# EAGLE board ControlParqueadero (EAGLE 5.07)
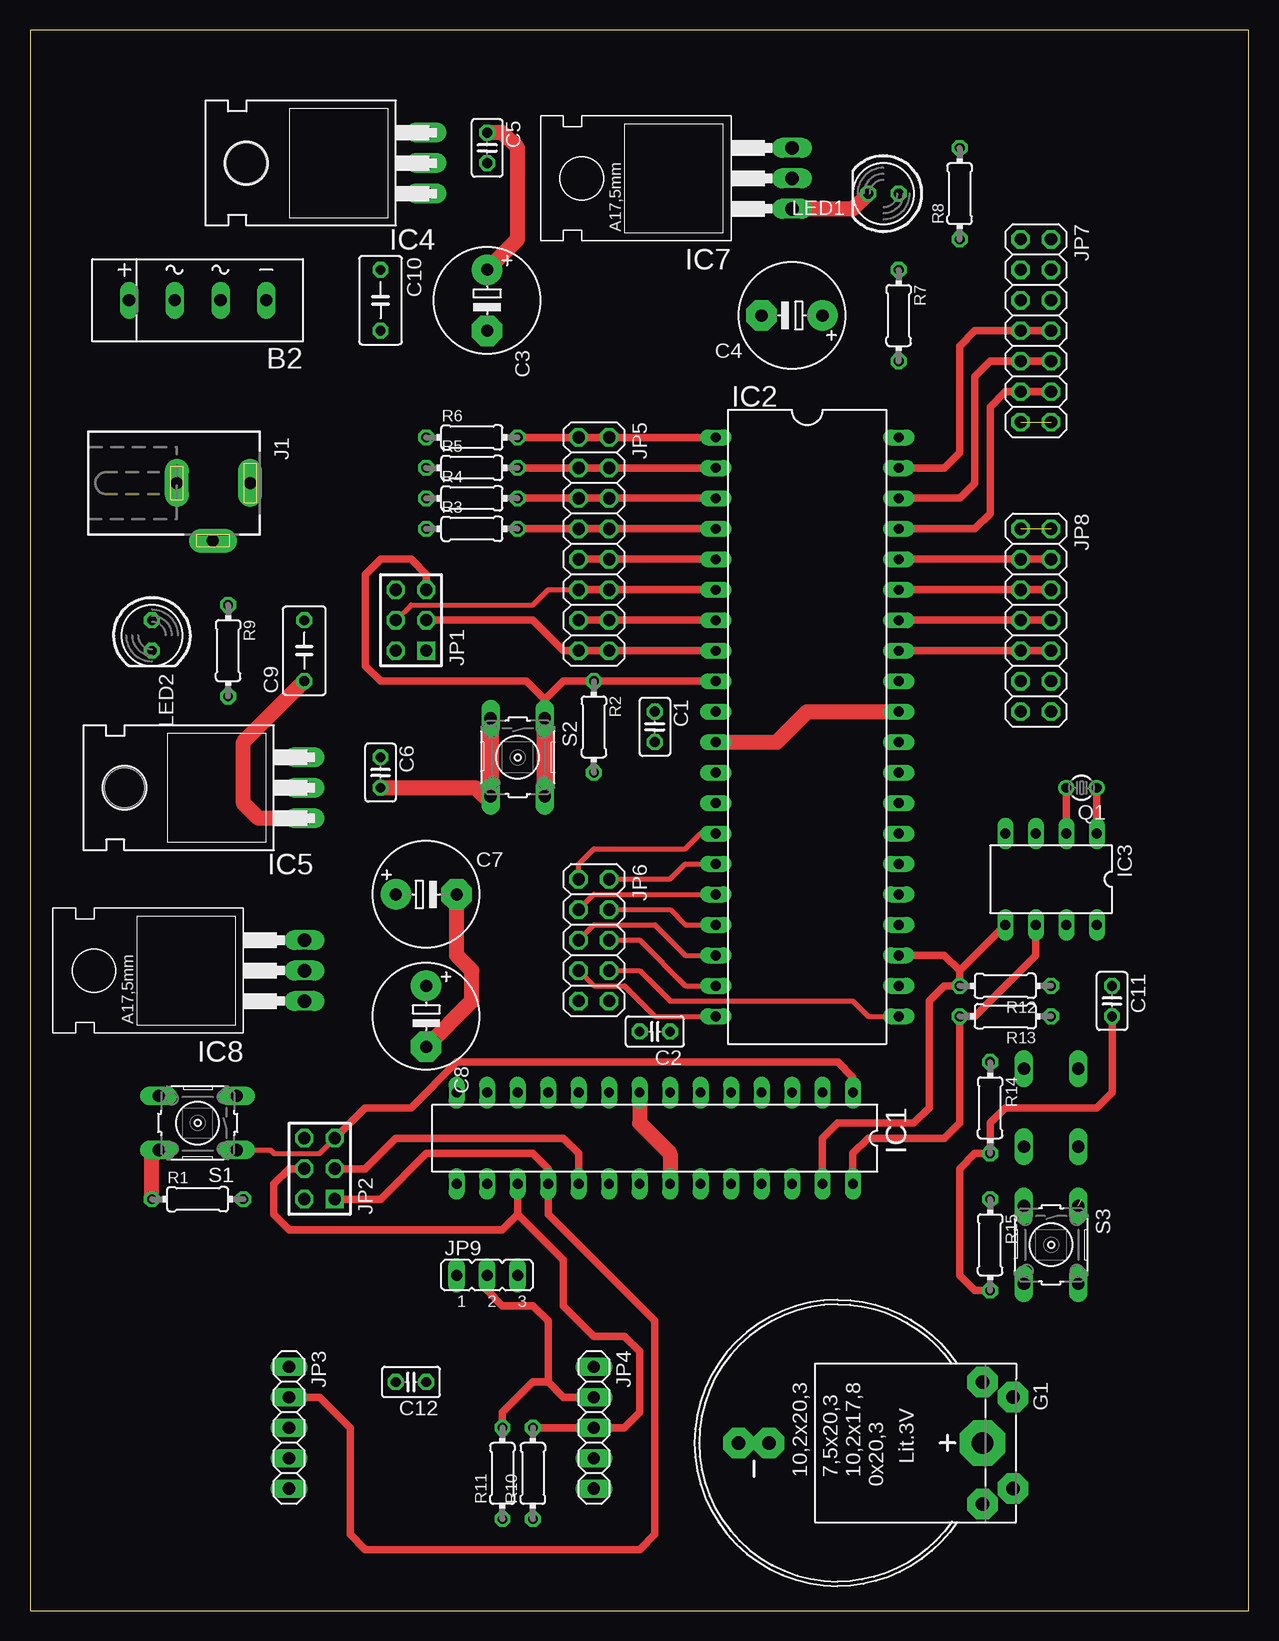
[diagram p0: board, top side]
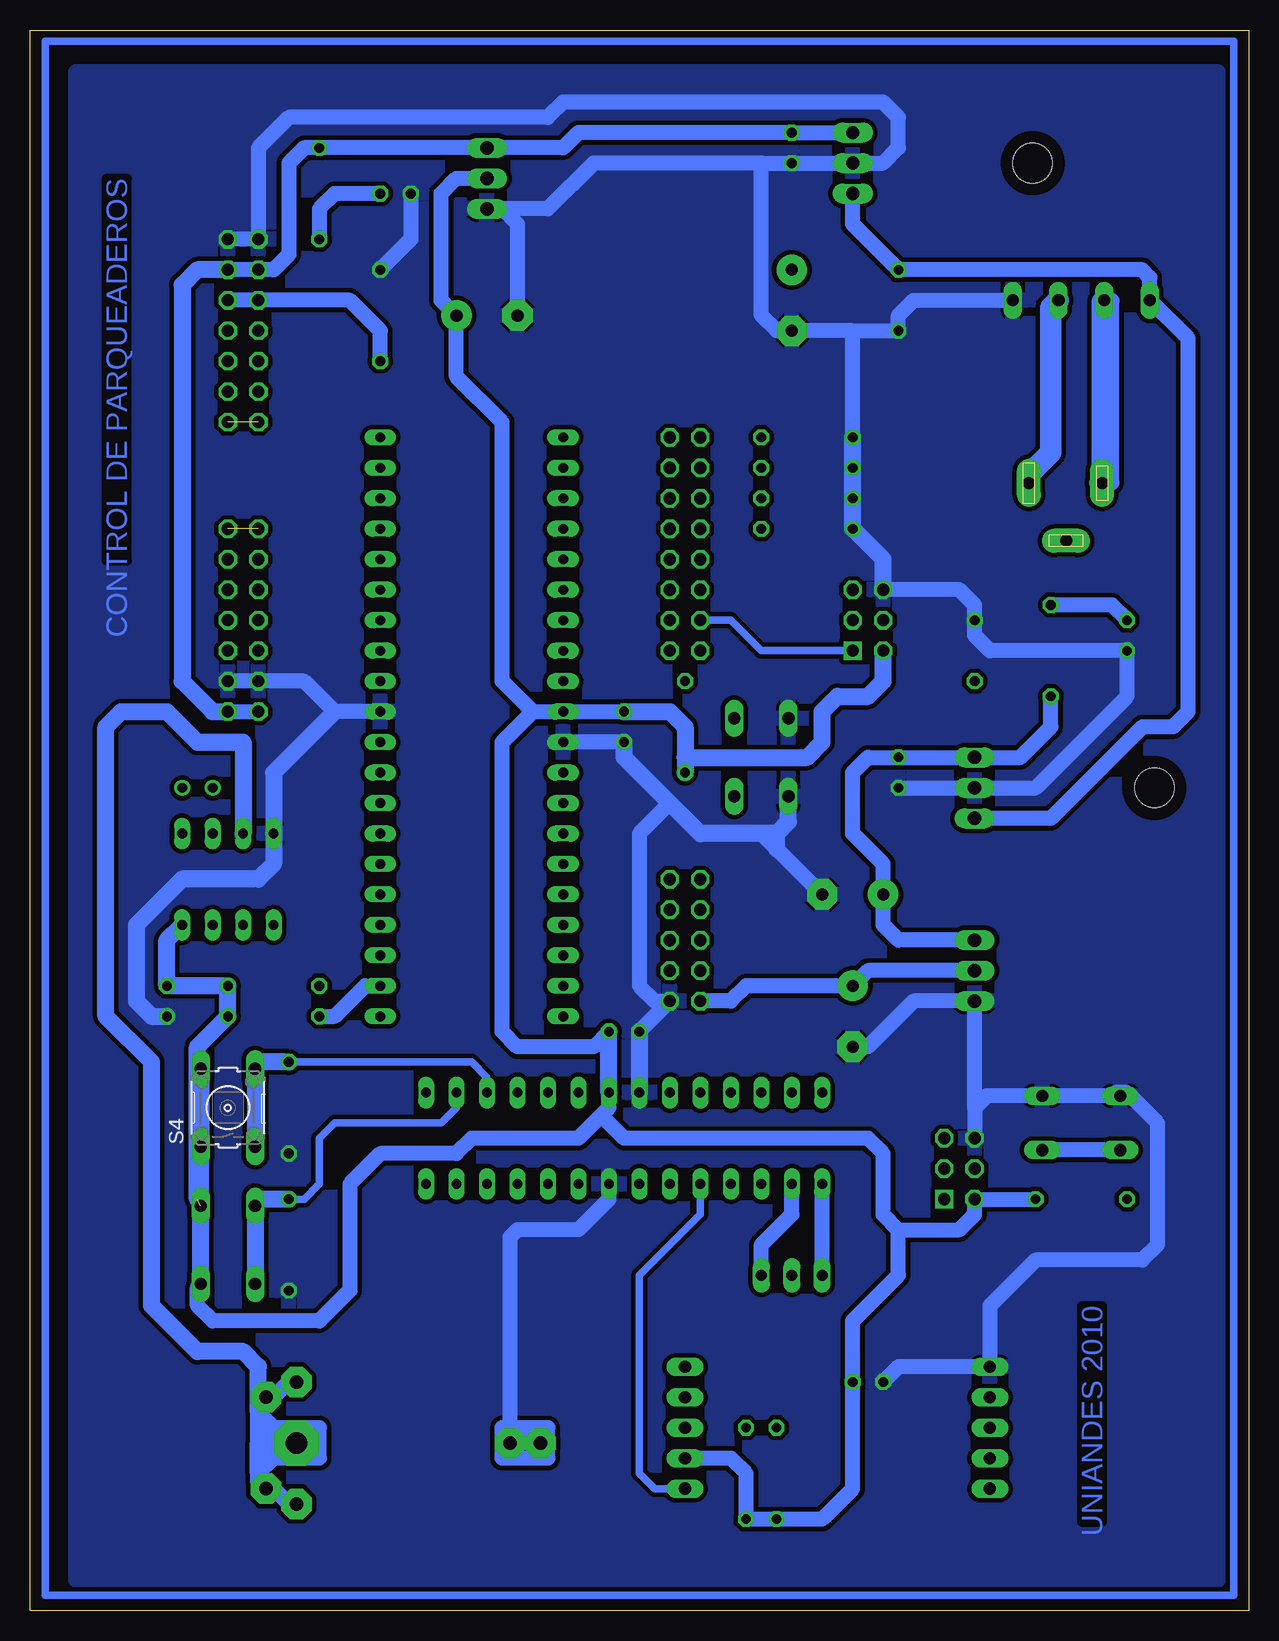
[diagram p1: board, bottom side, seen from below]

Size 101.58 x 131.75 mm. Coordinates in mm from the lower left corner, seen from the top.
Outline: 0,0 101.58,0 101.58,131.75 0,131.75 0,0
Copper layers (1*16): Top 0.035mm / dielectric 1.5mm / Bottom 0.035mm
Design rules "default *": minimum track width 10mil, minimum drill 24mil, track to track 15mil, track to pad 15mil, pad to pad 15mil, via to via 15mil, smd to smd 8mil, copper to edge 40mil, drill to drill 8mil, minimum pad ring 10mil, minimum via ring 8mil, stop-mask expansion 4mil, vias tented up to drill 0mil, thermal gap 10mil

## Footprints (pad centres in the part's own frame; a part is rotated, then mirrored left to right if it is on the bottom)
2KBP = drill 1.016 long: + 5.715,0; - -5.715,0; AC1 -1.905,0; AC2 1.905,0
C025-025X050 = drill 0.813 octagon: 1 -1.27,0; 2 1.27,0
E5-8,5 = drill 1.016 pad 2.54 round: + -2.54,0 | drill 1.016 pad 2.54 octagon: - 2.54,0
C050-035X075 = drill 0.813 octagon: 1 -2.54,0; 2 2.54,0
B2430UNI = drill 1.118 pad 2.54 octagon: + 3.81,14.605; +@1 -3.81,14.605; +@2 -5.08,12.065; +@3 5.08,12.065; - 0,-5.715; -@1 0,-8.255 | drill 1.803 pad 3.81 octagon: +@4 0,12.065
DIL28-3 = drill 0.813 long: 1 -16.51,-3.81; 2 -13.97,-3.81; 3 -11.43,-3.81; 4 -8.89,-3.81; 5 -6.35,-3.81; 6 -3.81,-3.81; 7 -1.27,-3.81; 8 1.27,-3.81; 9 3.81,-3.81; 10 6.35,-3.81; 11 8.89,-3.81; 12 11.43,-3.81; 13 13.97,-3.81; 14 16.51,-3.81; 15 16.51,3.81; 16 13.97,3.81; 17 11.43,3.81; 18 8.89,3.81; 19 6.35,3.81; 20 3.81,3.81; 21 1.27,3.81; 22 -1.27,3.81; 23 -3.81,3.81; 24 -6.35,3.81; 25 -8.89,3.81; 26 -11.43,3.81; 27 -13.97,3.81; 28 -16.51,3.81
DIL40 = drill 0.813 long: 1 -24.13,-7.62; 2 -21.59,-7.62; 3 -19.05,-7.62; 4 -16.51,-7.62; 5 -13.97,-7.62; 6 -11.43,-7.62; 7 -8.89,-7.62; 8 -6.35,-7.62; 9 -3.81,-7.62; 10 -1.27,-7.62; 11 1.27,-7.62; 12 3.81,-7.62; 13 6.35,-7.62; 14 8.89,-7.62; 15 11.43,-7.62; 16 13.97,-7.62; 17 16.51,-7.62; 18 19.05,-7.62; 19 21.59,-7.62; 20 24.13,-7.62; 21 24.13,7.62; 22 21.59,7.62; 23 19.05,7.62; 24 16.51,7.62; 25 13.97,7.62; 26 11.43,7.62; 27 8.89,7.62; 28 6.35,7.62; 29 3.81,7.62; 30 1.27,7.62; 31 -1.27,7.62; 32 -3.81,7.62; 33 -6.35,7.62; 34 -8.89,7.62; 35 -11.43,7.62; 36 -13.97,7.62; 37 -16.51,7.62; 38 -19.05,7.62; 39 -21.59,7.62; 40 -24.13,7.62
DIL08 = drill 0.813 long: 1 -3.81,-3.81; 2 -1.27,-3.81; 3 1.27,-3.81; 4 3.81,-3.81; 5 3.81,3.81; 6 1.27,3.81; 7 -1.27,3.81; 8 -3.81,3.81
TO220H = drill 1.118 long: 1 -2.54,-10.16; 2 0,-10.16; 3 2.54,-10.16 | hole 3.302: 0,4.826
TO220 = drill 1.118 long: 1 -2.54,-6.35; 2 0,-6.35; 3 2.54,-6.35
DCJ0202 = drill 1 pad 2 long: 1 0,3.1; 2 4.8,0; 3 0,-3
AVR-ISP-6 = drill 1.016 square: 1 -2.54,-1.27 | drill 1.016 octagon: 2 -2.54,1.27; 3 0,-1.27; 4 0,1.27; 5 2.54,-1.27; 6 2.54,1.27
1X05 = drill 1.016 long: 1 -5.08,0; 2 -2.54,0; 3 0,0; 4 2.54,0; 5 5.08,0
2X08 = drill 1.016 octagon: 1 -8.89,-1.27; 2 -8.89,1.27; 3 -6.35,-1.27; 4 -6.35,1.27; 5 -3.81,-1.27; 6 -3.81,1.27; 7 -1.27,-1.27; 8 -1.27,1.27; 9 1.27,-1.27; 10 1.27,1.27; 11 3.81,-1.27; 12 3.81,1.27; 13 6.35,-1.27; 14 6.35,1.27; 15 8.89,-1.27; 16 8.89,1.27
2X05 = drill 1.016 octagon: 1 -5.08,-1.27; 2 -5.08,1.27; 3 -2.54,-1.27; 4 -2.54,1.27; 5 0,-1.27; 6 0,1.27; 7 2.54,-1.27; 8 2.54,1.27; 9 5.08,-1.27; 10 5.08,1.27
2X07 = drill 1.016 octagon: 1 -7.62,-1.27; 2 -7.62,1.27; 3 -5.08,-1.27; 4 -5.08,1.27; 5 -2.54,-1.27; 6 -2.54,1.27; 7 0,-1.27; 8 0,1.27; 9 2.54,-1.27; 10 2.54,1.27; 11 5.08,-1.27; 12 5.08,1.27; 13 7.62,-1.27; 14 7.62,1.27
JP2 = drill 0.914 long: 1 -2.54,0; 2 0,0; 3 2.54,0
LED5MM = drill 0.813 octagon: A -1.27,0; K 1.27,0
TC26V = drill 0.813 round: 1 -1.27,0; 2 1.27,0
0204/7 = drill 0.813 octagon: 1 -3.81,0; 2 3.81,0
B3F-10XX = drill 1.016 long: 1 -3.251,2.261; 2 3.251,2.261; 3 -3.251,-2.261; 4 3.251,-2.261

## Placement (x,y rotation side)
B2  RECTIFIER-2KBP  [2KBP]  13.97,109.22 180 top
C1  [C025-025X050]  52.07,73.66 270 top
C2  [C025-025X050]  52.07,48.26 180 top
C3  [E5-8,5]  38.1,109.22 270 top
C4  [E5-8,5]  63.5,107.95 180 top
C5  0.1u  [C025-025X050]  38.1,121.92 270 top
C6  0.1u  [C025-025X050]  29.21,69.85 270 top
C7  [E5-8,5]  33.02,59.69 0 top
C8  [E5-8,5]  33.02,49.53 270 top
C9  0.33u  [C050-035X075]  22.86,80.01 90 top
C10  0.33u  [C050-035X075]  29.21,109.22 270 top
C11  [C025-025X050]  90.17,50.8 270 top
C12  [C025-025X050]  31.75,19.05 180 top
G1  B2430UNI  [B2430UNI]  67.31,13.97 270 top
IC1  ATMEGA48/88/168-PU  [DIL28-3]  52.07,39.37 180 top
IC2  MEGA164P/324P/644P-PU  [DIL40]  64.77,73.66 270 top
IC3  DS1307  [DIL08]  85.09,60.96 180 top
IC4  7805T  [TO220H]  22.86,120.65 90 top
IC5  7805T  [TO220H]  12.7,68.58 90 top
IC7  LM1117T-ADJ  [TO220]  57.15,119.38 90 top
IC8  LM1117T-ADJ  [TO220]  16.51,53.34 90 top
J1  DCJ0202  [DCJ0202]  15.24,93.98 270 top
JP1  AVR-ISP-6  [AVR-ISP-6]  31.75,82.55 90 top
JP2  AVR-ISP-6  [AVR-ISP-6]  24.13,36.83 90 top
JP3  [1X05]  21.59,15.24 270 top
JP4  [1X05]  46.99,15.24 270 top
JP5  [2X08]  46.99,88.9 270 top
JP6  [2X05]  46.99,55.88 270 top
JP7  [2X07]  83.82,106.68 270 top
JP8  [2X07]  83.82,82.55 270 top
JP9  [JP2]  38.1,27.94 0 top
LED1  [LED5MM]  71.12,118.11 180 top
LED2  [LED5MM]  10.16,81.28 270 top
Q1  [TC26V]  87.63,68.58 180 top
R1  1K  [0204/7]  13.97,34.29 0 top
R2  1K  [0204/7]  46.99,73.66 270 top
R3  1K  [0204/7]  36.83,90.17 0 top
R4  1K  [0204/7]  36.83,92.71 0 top
R5  1K  [0204/7]  36.83,95.25 0 top
R6  1K  [0204/7]  36.83,97.79 0 top
R7  [0204/7]  72.39,107.95 270 top
R8  330  [0204/7]  77.47,118.11 90 top
R9  270  [0204/7]  16.51,80.01 270 top
R10  1K  [0204/7]  41.91,11.43 90 top
R11  1K  [0204/7]  39.37,11.43 90 top
R12  1K  [0204/7]  81.28,52.07 180 top
R13  1K  [0204/7]  81.28,49.53 180 top
R14  1K  [0204/7]  80.01,41.91 270 top
R15  1K  [0204/7]  80.01,30.48 270 top
S1  [B3F-10XX]  13.97,40.64 180 top
S2  [B3F-10XX]  40.64,71.12 270 top
S3  [B3F-10XX]  85.09,30.48 270 top
S4  [B3F-10XX]  85.09,41.91 90 bottom

## Library data of the parts
B2 = rectifier
C1-C12 R1-R15 = rcl
G1 = battery
IC1 = atmega8
IC2 JP1 JP2 = avr-6
IC3 = ds1307_pcf8583
IC4 IC5 = linear
IC7 IC8 = lm1117
J1 = con-jack
JP3-JP8 = pinhead
JP9 = jumper
LED1 LED2 = led
Q1 = crystal
S1-S4 = switch-omron

## Nets
+3V3: C1.1 C2.1 C4.+ C11.1 C12.1 IC1.7 IC2.10 IC3.8 IC7.2 JP1.2 JP2.2 JP4.4 R1.2 R2.2 R10.1 R11.1 R12.1 R13.1 S3.1 S3.2 S4.1 S4.2
+5V: C3.+ C5.1 IC4.3 IC7.3 JP7.3 JP7.4 JP8.13 JP8.14 R8.2
+5V/1: C6.1 C7.+ IC5.3 IC8.3 R9.2
+9V: B2.+ C9.1 C10.1 IC4.1 IC5.1
AREF: IC2.32
AVCC: IC2.30
GND: B2.- C1.2 C2.2 C3.- C4.- C5.2 C6.2 C7.- C8.- C9.2 C10.2 C11.2 C12.2 G1.- IC1.8 IC1.22 IC2.11 IC2.31 IC3.4 IC4.2 IC5.2 IC7.1 IC8.1 JP1.6 JP2.6 JP3.1 JP6.10 JP7.1 JP7.2 JP8.11 JP8.12 LED1.K LED2.K R3.1 R4.1 R5.1 R6.1 R7.1 R14.2 R15.2 S1.3 S1.4 S2.3 S2.4
N$1: IC1.1 JP2.5 R1.1 S1.1 S1.2
N$2: IC1.2 R15.1 S3.3 S3.4
N$3: IC2.9 JP1.5 R2.1 S2.1 S2.2
N$4: IC1.3 R14.1 S4.3 S4.4
N$5: JP4.2 JP9.2 R11.2
N$9: IC1.27 IC2.23 IC3.5 R12.2
N$11: IC1.28 IC2.22 IC3.6 R13.2
N$19: IC3.2 Q1.2
N$21: LED1.A R8.1
N$22: G1.+ IC3.3
N$23: B2.AC1 J1.1
N$24: B2.AC2 J1.3
N$25: LED2.A R9.1
N$27: IC2.33 JP8.9 JP8.10
N$28: IC2.34 JP8.7 JP8.8
N$29: IC2.35 JP8.5 JP8.6
N$30: IC2.36 JP8.3 JP8.4
N$32: IC3.1 Q1.1
N$37: JP7.5 JP7.6 R7.2
N$38: IC2.39 JP7.7 JP7.8
N$39: IC2.38 JP7.9 JP7.10
N$40: IC2.37 JP7.11 JP7.12
N$41: JP7.13 JP7.14
N$42: JP8.1 JP8.2
PORTB1: IC1.15 JP9.1
PORTB2: IC1.16 JP9.3
PORTB3: IC1.17 JP2.4 JP4.3 R10.2
PORTB4: IC1.18 JP2.1 JP3.2
PORTB5: IC1.19 JP2.3 JP4.5
PORTB_A0: IC2.1 JP5.1 JP5.2 R6.2
PORTB_A1: IC2.2 JP5.3 JP5.4 R5.2
PORTB_A2: IC2.3 JP5.5 JP5.6 R4.2
PORTB_A3: IC2.4 JP5.7 JP5.8 R3.2
PORTB_A4: IC2.5 JP5.9 JP5.10
PORTB_A5: IC2.6 JP1.4 JP5.11 JP5.12
PORTB_A6: IC2.7 JP1.1 JP5.13 JP5.14
PORTB_A7: IC2.8 JP1.3 JP5.15 JP5.16
PORTC0: IC2.14 JP6.1
PORTC1: IC2.15 JP6.2
PORTC2: IC2.16 JP6.3
PORTC3: IC2.17 JP6.4
PORTC4: IC2.18 JP6.5
PORTC5: IC2.19 JP6.6
PORTC6: IC2.20 JP6.7
PORTC7: IC2.21 JP6.8
VCC: C8.+ IC8.2 JP6.9

## Tracks (layer width: path | path; a pad name or v marks a point on that pad's centre or on a via)
+3V3  (1 unrouted)
  Bottom 1.27: C1.1 IC2.10 59.69,74.93 | IC7.2 66.04,119.38 67.31,118.11 67.31,109.22 C4.+ 66.04,102.87 62.23,99.06 62.23,77.47 59.69,74.93 | IC1.7 53.34,41.91 53.97,41.27 | 53.97,41.27 55.88,39.37 64.77,39.37 66.04,38.1 72.39,38.1 74.93,35.56 74.93,26.67 77.47,24.13 86.36,24.13 87.63,25.4 87.63,26.95 S3.2 | 29.21,31.75 24.13,31.75 22.86,33.02 JP2.2 R1.2 | 29.21,31.75 30.48,33.02 30.48,38.1 31.75,39.37 52.07,39.37 53.97,41.27 | C2.1 54.61,46.99 60.96,46.99 62.23,48.26 62.23,72.39 59.69,74.93 | 29.21,31.75 29.21,27.94 33.02,24.13 C12.1 33.02,10.16 35.56,7.62 R11.1 R10.1 41.91,11.43 43.18,12.7 JP4.4
  Bottom 1.422: 46.99,71.12 46.99,73.66 48.26,74.93 C1.1 | 46.99,71.12 R2.2 | 46.99,71.12 36.83,71.12 35.56,72.39 35.56,74.93 34.29,76.2 31.75,76.2 30.48,77.47 JP1.2 | IC1.7 C2.1 | IC3.8 90.17,55.88 C11.1 R12.1 R13.1 87.63,46.99 87.63,34.29 87.35,34.57 S4.2 S4.1 | S3.2 S3.1
+5V
  Top 1.27: C3.+ 40.64,114.3 40.64,121.92 39.37,123.19 C5.1
  Bottom 1.27: JP7.4 JP7.3 81.28,111.76 80.01,113.03 80.01,120.65 78.74,121.92 R8.2 IC7.3 57.15,121.92 55.88,123.19 C5.1 IC4.3 | JP8.14 JP8.13
  Bottom 1.422: JP8.14 86.36,74.93 88.9,77.47 88.9,110.49 87.63,111.76 JP7.4
+5V/1
  Bottom 1.27: R9.2 16.51,73.66 19.05,71.12 IC5.3 C6.1 31.75,71.12 33.02,69.85 33.02,64.77 30.48,62.23 C7.+ 30.48,57.15 29.21,55.88 IC8.3
+9V
  Top 1.27: C9.1 17.78,72.39 17.78,67.31 19.05,66.04 IC5.1
  Bottom 1.27: IC4.1 33.02,115.57 C10.1 8.89,111.76 8.25,111.12 B2.+ 5.08,106.04 5.08,74.93 6.35,73.66 8.89,73.66 16.51,66.04 IC5.1
GND
  Top 0.61: R15.2 78.74,26.67 77.47,27.94 77.47,36.83 78.74,38.1 R14.2 80.01,40.64 81.28,41.91 88.9,41.91 90.17,43.18 C11.2
  Top 1.27: IC7.1 68.58,116.84 LED1.K | C6.2 37.11,68.58 38.38,67.31 38.38,69.85 | IC1.8 50.8,40.64 53.34,38.1 IC1.22 | C7.- 35.56,54.61 36.83,53.34 36.83,50.8 C8.- | IC2.11 62.23,72.39 64.77,74.93 IC2.31
  Top 1.422: S2.4 38.38,69.85 S2.3
  Bottom 1.27: JP7.2 JP7.1 82.55,121.92 80.01,124.46 58.42,124.46 57.15,125.73 30.48,125.73 29.21,124.46 29.21,121.92 30.48,120.65 IC4.2 C5.2 40.64,120.65 | JP8.12 JP8.11 78.74,77.47 76.2,74.93 IC2.31 | C1.2 IC2.11 | B2.- 27.94,109.22 29.21,107.95 C10.2 33.02,106.68 | 62.23,116.84 58.42,116.84 54.61,120.65 40.64,120.65 | 33.02,106.68 C3.- 39.37,106.68 40.64,107.95 40.64,120.65 | R7.1 69.85,114.3 LED1.K | 62.23,116.84 IC7.1 | 62.23,116.84 60.96,115.57 C4.- | C6.2 IC5.2 17.78,68.58 10.16,76.2 LED2.K 21.59,80.01 22.86,81.28 C9.2 22.86,83.82 24.13,85.09 JP1.6 | C8.- 31.75,46.99 27.94,50.8 IC8.1 22.86,41.91 | R6.1 33.02,106.68 | C2.2 JP6.10 49.53,50.8 50.8,52.07 50.8,64.77 48.26,67.31 | 22.86,41.91 JP2.6 | C7.- 39.37,63.5 40.64,64.77 | G1.- 61.59,31.11 60.96,31.75 55.88,31.75 53.34,34.29 IC1.22 | 22.86,41.91 21.87,42.9 S1.3 11.43,42.9 | 11.43,42.9 S1.4 | C12.2 29.21,20.32 JP3.1 21.59,25.4 17.78,29.21 8.89,29.21 7.62,30.48 7.62,40.64 10.16,43.18 11.15,43.18 11.43,42.9
  Bottom 1.422: S2.4 38.38,65.76 39.37,64.77 | C1.2 52.07,71.12 48.26,67.31 45.72,64.77 40.64,64.77 39.37,64.77 | R6.1 R5.1 R4.1 R3.1 30.48,87.63 JP1.6 | C2.2 IC1.8 | 76.2,74.93 81.28,69.85 IC3.4 81.28,62.23 82.55,60.96 88.9,60.96 92.71,57.15 92.71,50.8 91.44,49.53 C11.2 | 39.37,63.5 39.37,64.77
  pour Bottom: 2.54,128.27 97.79,128.27 97.79,13.97 97.79,2.54 7.62,2.54 2.54,2.54
N$1
  Top 0.406: S1.1 20.04,38.38 20.32,38.1 24.13,38.1 JP2.5
  Top 0.61: IC1.1 68.58,44.45 67.31,45.72 35.56,45.72 31.75,41.91 27.94,41.91 JP2.5
  Top 1.27: R1.1 10.16,37.82 S1.2
  Bottom 1.27: S1.2 S1.1
N$2
  Bottom 0.61: IC1.2 66.04,41.91 67.31,40.64 76.2,40.64 77.47,39.37 77.47,35.56 78.74,34.29 R15.1
  Bottom 1.422: S3.4 S3.3 82.83,34.01 82.55,34.29 R15.1
N$3
  Top 0.61: 42.9,75.92 S2.1 | 42.9,75.92 44.45,77.47 R2.1 IC2.9 | JP1.5 33.02,86.36 31.75,87.63 29.21,87.63 27.94,86.36 27.94,78.74 29.21,77.47 41.35,77.47 42.9,75.92
  Top 1.422: S2.1 S2.2
N$4
  Bottom 0.61: IC1.3 63.5,44.45 64.77,45.72 R14.1
  Bottom 1.422: R14.1 82.55,45.72 82.83,45.44 S4.4 S4.3
N$5
  Top 0.61: JP4.2 44.45,17.78 43.18,19.05 | 43.18,19.05 43.18,24.13 41.91,25.4 39.37,25.4 38.1,26.67 JP9.2 | R11.2 39.37,16.51 41.91,19.05 43.18,19.05
N$6
  Bottom 1.27: 62.23,13.97 60.96,13.97 58.42,13.97
N$7
  Bottom 1.27: 60.96,15.24 58.42,15.24 58.42,12.7 62.23,12.7 62.23,15.24
N$8
  Bottom 0.61: 1.27,130.81 100.33,130.81 100.33,1.27 1.27,1.27 1.27,130.81
N$9
  Top 0.61: 77.47,53.34 R12.2 76.2,52.07 74.93,50.8 74.93,41.91 73.66,40.64 67.31,40.64 66.04,39.37 IC1.27 | 77.47,53.34 76.2,54.61 IC2.23 | 77.47,53.34 IC3.5
N$10
  Bottom 1.27: 11.43,109.22 11.43,93.98 12.7,93.98
N$11
  Top 0.61: IC3.6 83.82,54.61 78.74,49.53 R13.2 77.47,40.64 76.2,39.37 69.85,39.37 68.58,38.1 IC1.28
  Bottom 1.27: R13.2 76.2,49.53 73.66,52.07 IC2.22
N$19
  Top 0.61: IC3.2 Q1.2
N$21
  Bottom 1.27: LED1.A 76.2,118.11 77.47,116.84 R8.1
N$22
  Bottom 1.27: 82.55,13.97 81.28,13.97 | 81.28,13.97 78.74,13.97 | 81.28,13.97 82.55,15.24 82.55,12.7 81.28,13.97 | 78.74,8.89 80.01,8.89 82.55,11.43 | 82.55,11.43 82.55,16.51 | 82.55,16.51 81.28,17.78 | 81.28,15.24 77.47,15.24 77.47,12.7 81.28,12.7 | 81.28,15.24 82.55,16.51 | 81.28,12.7 81.28,15.24 | 81.28,12.7 82.55,11.43 | 82.55,17.78 81.28,17.78 | 81.28,17.78 80.01,19.05 78.74,19.05
  Bottom 1.422: IC3.3 83.82,72.39 87.63,72.39 90.17,74.93 93.98,74.93 95.25,73.66 95.25,49.53 91.44,45.72 91.44,25.4 87.63,21.59 83.82,21.59 82.55,20.32 82.55,17.78 82.55,16.51 82.55,15.24 82.55,13.97 82.55,12.7 82.55,11.43 82.55,10.79 G1.+
N$23
  Bottom 1.778: J1.1 18.34,94.69 16.51,96.52 16.51,108.59 B2.AC1
N$24
  Bottom 1.778: J1.3 12.24,109.04 B2.AC2
N$25
  Bottom 1.27: LED2.A 11.43,83.82 R9.1
N$27
  Top 0.61: IC2.33 JP8.9 JP8.10
N$28
  Top 0.61: IC2.34 JP8.7 JP8.8
N$29
  Top 0.61: IC2.35 JP8.5 JP8.6
N$30
  Top 0.61: IC2.36 JP8.3 JP8.4
N$32
  Top 0.61: IC3.1 Q1.1
N$37
  Bottom 1.27: R7.2 72.39,106.68 74.93,109.22 JP7.5 JP7.6
N$38
  Top 0.61: JP7.8 JP7.7 78.74,106.68 77.47,105.41 77.47,96.52 76.2,95.25 IC2.39
N$39
  Top 0.61: JP7.10 JP7.9 80.01,104.14 78.74,102.87 78.74,93.98 77.47,92.71 IC2.38
N$40
  Top 0.61: JP7.12 JP7.11 81.28,101.6 80.01,100.33 80.01,91.44 78.74,90.17 IC2.37
N$41  (1 unrouted)
N$42  (1 unrouted)
PORTB1
  Bottom 1.27: JP9.1 IC1.15
PORTB2
  Bottom 1.27: JP9.3 40.64,30.48 38.1,33.02 IC1.16
PORTB3
  Top 0.61: JP2.4 21.59,36.83 20.32,35.56 20.32,33.02 21.59,31.75 39.37,31.75 40.64,33.02 | 40.64,33.02 IC1.17 | 40.64,33.02 44.45,29.21 44.45,25.4 46.99,22.86 49.53,22.86 50.8,21.59 50.8,16.51 49.53,15.24 JP4.3 R10.2
PORTB4
  Top 0.61: JP2.1 29.21,34.29 33.02,38.1 41.91,38.1 43.18,36.83 IC1.18 43.18,33.02 52.07,24.13 52.07,6.35 50.8,5.08 27.94,5.08 26.67,6.35 26.67,15.24 24.13,17.78 JP3.2
PORTB5
  Top 0.61: IC1.19 45.72,38.1 44.45,39.37 30.48,39.37 27.94,36.83 JP2.3
  Bottom 0.61: JP4.5 49.53,10.16 50.8,11.43 50.8,27.94 45.72,33.02 IC1.19
PORTB_A0
  Top 0.61: IC2.1 JP5.2 JP5.1 R6.2
PORTB_A1
  Top 0.61: R5.2 JP5.3 JP5.4 IC2.2
PORTB_A2
  Top 0.61: R4.2 JP5.5 JP5.6 IC2.3
PORTB_A3
  Top 0.61: R3.2 JP5.7 JP5.8 IC2.4
PORTB_A4
  Top 0.61: IC2.5 JP5.10 JP5.9
PORTB_A5
  Top 0.406: JP1.4 31.75,83.82 41.91,83.82 43.18,85.09 JP5.11
  Top 0.61: IC2.6 JP5.12 JP5.11
PORTB_A6
  Top 0.61: IC2.7 JP5.14 JP5.13
  Bottom 0.61: JP1.1 40.64,80.01 43.18,82.55 JP5.13
PORTB_A7
  Top 0.61: IC2.8 JP5.16 JP5.15 44.45,80.01 41.91,82.55 JP1.3
PORTC0
  Top 0.406: JP6.1 45.72,62.23 46.99,63.5 54.61,63.5 55.88,64.77 IC2.14
PORTC1
  Top 0.406: JP6.2 53.34,60.96 54.61,62.23 IC2.15
PORTC2
  Top 0.406: IC2.16 46.99,59.69 JP6.3
PORTC3
  Top 0.406: IC2.17 54.61,57.15 53.34,58.42 JP6.4
PORTC4
  Top 0.406: JP6.5 46.99,57.15 52.07,57.15 54.61,54.61 IC2.18
PORTC5
  Top 0.406: JP6.6 50.8,55.88 54.61,52.07 IC2.19
PORTC6
  Top 0.406: IC2.20 52.07,49.53 49.53,52.07 46.99,52.07 JP6.7
PORTC7
  Top 0.406: JP6.8 50.8,53.34 53.34,50.8 68.58,50.8 69.85,49.53 IC2.21
VCC
  Bottom 1.27: IC8.2 31.75,53.34 C8.+ 41.91,52.07 43.18,50.8 JP6.9

## Text on the board
Bottom: CONTROL DE PARQUEADEROS | UNIANDES 2010